# Allegro board SADA_controller.brd
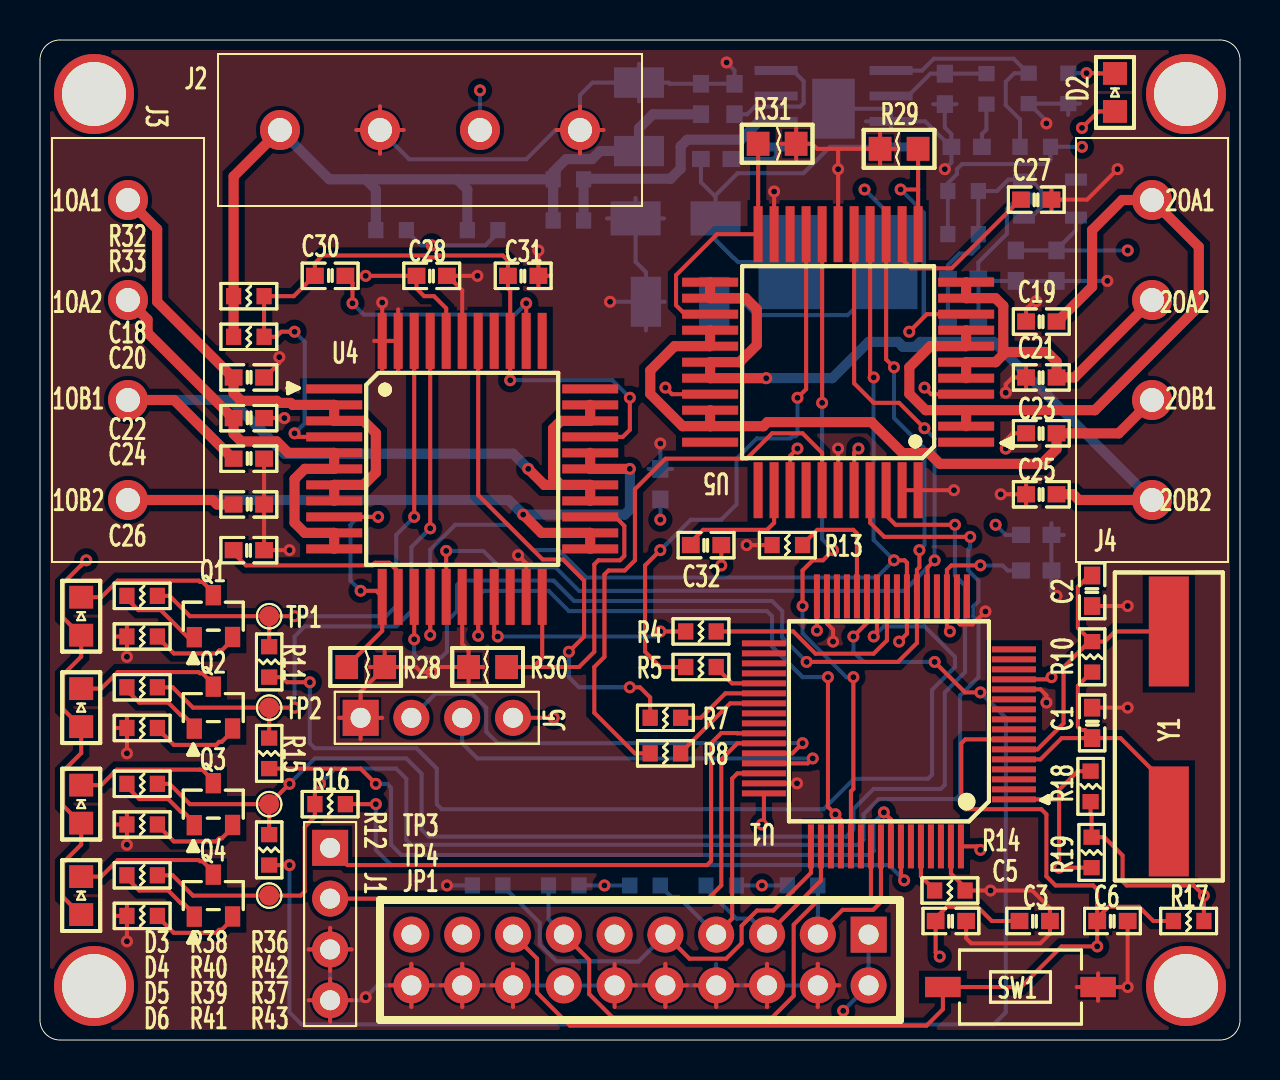
[diagram p0: board, top side]
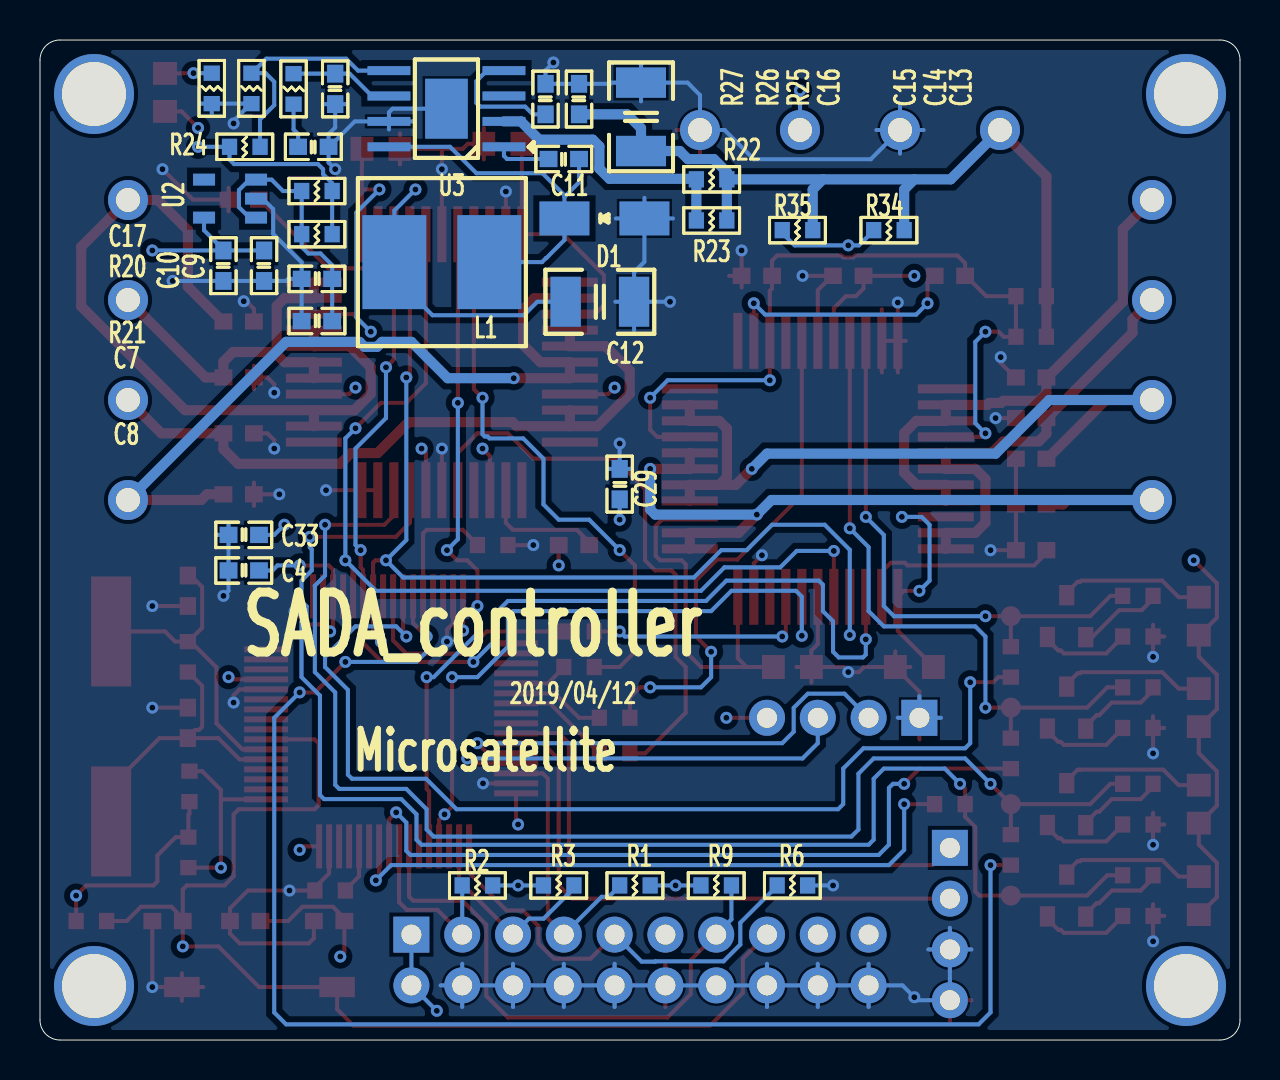
[diagram p1: board, bottom side, seen from below]

Outline 60 x 50 mm; copper layers: TOP, GND, POWER, BOTTOM. Coordinates in mm from the lower left corner of the outline.
Outline path: 0,49 arc(0.29,49.71) 1,50 59,50 arc(59.71,49.71) 60,49 60,1 arc(59.71,0.29) 59,0 1,0 arc(0.29,0.29) 0,1 0,49

## Placement (name value [footprint] x y rotation side)
C1  20pF  [SC0603]  52.61 15.86 90 top
C2  20pF  [SC0603]  52.61 22.46 270 top
C3  100nF  [SC0603]  49.74 5.95 0 top
C4  1uF  [SC0603]  49.81 23.48 0 bottom
C5  10uF  [SC0603]  45.54 5.95 0 top
C6  100nF  [SC0603]  53.62 5.95 0 top
C7  100nF  [SC0603]  46.15 38.06 0 bottom
C8  10uF  [SC0603]  46.15 35.95 0 bottom
C9  100nF  [SC0603]  48.8 38.72 270 bottom
C10  10uF  [SC0603]  50.83 38.72 270 bottom
C11  100nF  [SC0603]  33.81 44.05 180 bottom
C12  22uF  [SC1210]  32.01 36.91 180 bottom
C13  10uF/50V  [SC1210]  29.95 46.16 90 bottom
C14  100nF  [SC0603]  33.05 47.05 270 bottom
C15  8.2nF  [SC0603]  34.72 47.05 270 bottom
C16  25pF  [SC0603]  45.24 47.56 270 bottom
C17  1.2nf  [SC0603]  46.33 44.66 180 bottom
C18  100pF/100V  [SC0603]  10.44 33.13 180 top
C19  100pF/100V  [SC0603]  50.07 35.92 0 top
C20  100pF/100V  [SC0603]  10.44 31.1 180 top
C21  100pF/100V  [SC0603]  50.07 33.13 0 top
C22  100pF/100V  [SC0603]  10.44 29.06 180 top
C23  100pF/100V  [SC0603]  50.07 30.33 0 top
C24  100pF/100V  [SC0603]  10.44 26.78 180 top
C25  100pF/100V  [SC0603]  50.07 27.29 0 top
C26  470nF/16V  [SC0603]  10.44 24.49 0 top
C27  470nF/16V  [SC0603]  49.81 42.02 0 top
C28  100nF/50V  [SC0603]  19.59 38.21 0 top
C29  100nF/50V  [SC0603]  31.02 27.79 90 bottom
C30  220nF/16V  [SC0603]  14.51 38.21 180 top
C31  100nF/50V  [SC0603]  24.16 38.21 0 top
C32  220nF/16V  [SC0603]  33.3 24.75 0 top
C33  100nF/50V  [SC0603]  49.81 25.25 0 bottom
D1  B320A  [SMA]  31.78 41.08 0 bottom
D2  Green  [LED0805]  53.75 47.38 270 top
D3  Yellow  [LED0805]  2.06 21.19 270 top
D4  Yellow  [LED0805]  2.06 16.62 270 top
D5  Yellow  [LED0805]  2.06 11.79 270 top
D6  Yellow  [LED0805]  2.06 7.22 270 top
J1  CON_UART  [CON_IP]  14.51 5.8 0 top
J2  CON_PWR  [CON4]  19.5 45.5 270 top
J3  CON_DRV  [CON4]  4.4 34.5 0 top
J4  CON_DRV  [CON4]  55.6 34.5 0 top
J5  CON_IO  [CON_IP]  19.84 16.11 90 top
JP1  -  [JTAG]  30 4 180 top
L1  6.8uH  [SL]  39.91 38.89 0 bottom
Q1  9013  [SOT23_3]  8.66 21.19 0 top
Q2  9013  [SOT23_3]  8.66 16.62 0 top
Q3  9013  [SOT23_3]  8.66 11.79 0 top
Q4  9013  [SOT23_3]  8.66 7.22 0 top
R1  10K  [SR0603]  30.25 7.73 0 bottom
R2  10K  [SR0603]  38.13 7.73 0 bottom
R3  10K  [SR0603]  34.06 7.73 180 bottom
R4  0  [SR0603]  33.05 20.43 180 top
R5  0  [SR0603]  33.05 18.65 180 top
R6  10K  [SR0603]  22.38 7.73 0 bottom
R7  0  [SR0603]  31.27 16.11 180 top
R8  0  [SR0603]  31.27 14.33 180 top
R9  10K  [SR0603]  26.19 7.73 180 bottom
R10  1M  [SR0603]  52.61 19.16 90 top
R11  0  [SR0603]  11.46 18.9 270 top
R12  0  [SR0603]  11.46 9.51 270 top
R13  10K  [SR0603]  37.37 24.75 0 top
R14  10K  [SR0603]  45.49 7.47 0 top
R15  0  [SR0603]  11.46 14.33 270 top
R16  0  [SR0603]  14.51 11.79 0 top
R17  10K  [SR0603]  57.43 5.95 180 top
R18  2  [SR0603]  52.53 12.68 270 top
R19  2  [SR0603]  52.58 9.38 90 top
R20  510m  [SR0603]  46.15 42.45 180 bottom
R21  510m  [SR0603]  46.15 40.29 180 bottom
R22  510m  [SR0603]  26.42 43.03 180 bottom
R23  510m  [SR0603]  26.42 40.98 180 bottom
R24  27K  [SR0603]  49.76 44.66 180 bottom
R25  36K  [SR0603]  47.32 47.56 270 bottom
R26  5.1K  [SR0603]  49.43 47.58 270 bottom
R27  560  [SR0603]  51.41 47.58 270 bottom
R28  0R15  [SR0805]  16.28 18.65 180 top
R29  0R15  [SR0805]  42.95 44.56 0 top
R30  0R15  [SR0805]  22.38 18.65 0 top
R31  0R15  [SR0805]  36.86 44.81 180 top
R32  510m  [SR0603]  10.44 37.19 0 top
R33  510m  [SR0603]  10.44 35.16 0 top
R34  510m  [SR0603]  17.55 40.49 0 bottom
R35  510m  [SR0603]  22.13 40.49 0 bottom
R36  1K  [SR0603]  5.11 12.81 180 top
R37  1K  [SR0603]  5.11 8.24 180 top
R38  1K  [SR0603]  5.11 22.21 180 top
R39  1K  [SR0603]  5.11 17.63 180 top
R40  200  [SR0603]  5.11 20.17 0 top
R41  200  [SR0603]  5.11 15.6 0 top
R42  200  [SR0603]  5.11 10.78 0 top
R43  200  [SR0603]  5.11 6.2 0 top
REF DES  -  [unnamed]  2.7 47.3 0 top
REF DES#2  -  [unnamed]  57.3 47.3 0 top
REF DES#3  -  [unnamed]  2.7 2.7 0 top
REF DES#4  -  [unnamed]  57.3 2.7 0 top
SW1  RST  [SW]  49.02 2.65 0 top
TP1  -  [TP]  11.46 21.19 0 top
TP2  -  [TP]  11.46 16.62 0 top
TP3  -  [TP]  11.46 11.79 0 top
TP4  -  [TP]  11.46 7.22 0 top
U1  STM32F103RBT6  [LQFP64]  42.45 15.93 180 top
U2  TPS73633DBV  [SOT23_5]  50.5 42.07 0 bottom
U3  TPS54332  [SOIC-PAD]  39.68 46.56 90 bottom
U4  TMC260  [PQFP44]  21.11 28.56 0 top
U5  TMC260  [PQFP44]  39.91 33.89 180 top
Y1  8M  [CRYSTAL]  56.44 15.68 270 top

## Library data of the parts
C1-C33 = CAP NP
D1 = DIODE SCHOTTKY
D2-D6 = LED
J1-J5 = CON4
JP1 = JTAG_1
L1 = INDUCTOR
Q1-Q4 = 2N1069
R1-R43 = R
SW1 = SW_PB_SPST
TP1-TP4 = TP
U1 = STM32F103RBT6_1
U2 = TPS73633DBV_0
U3 = TPS54332
U4 U5 = TMC260_2
Y1 = CRYSTAL

## Footprints (pads in the part's own frame, mm; a bottom-side part is the same pattern mirrored in y, then rotated)
CON4
  round 2 hole 1.2: 1(0,7.5) 2(0,2.5) 3(0,-2.5) 4(0,-7.5)
CON_IP
  rect 1.8x1.8 hole 1: 1(0,3.81)
  round 1.8 hole 1: 2(0,1.27) 3(0,-1.27) 4(0,-3.81)
CRYSTAL
  rect 5.5x2 smd: 1(-4.75,0) 2(4.75,0)
JTAG
  rect 1.8x1.8 hole 1: 1(-11.43,-1.27)
  round 1.8 hole 1: 2(-11.43,1.27) 3(-8.89,-1.27) 4(-8.89,1.27) 5(-6.35,-1.27) 6(-6.35,1.27) 7(-3.81,-1.27) 8(-3.81,1.27) 9(-1.27,-1.27) 10(-1.27,1.27) 11(1.27,-1.27) 12(1.27,1.27) 13(3.81,-1.27) 14(3.81,1.27) 15(6.35,-1.27) 16(6.35,1.27) 17(8.89,-1.27) 18(8.89,1.27) 19(11.43,-1.27) 20(11.43,1.27)
LED0805
  rect 1.14x1.2 smd: 1(-0.95,0) 2(0.95,0)
LQFP64
  rect 2.2x0.3 smd: 1(-6.25,3.9) 2(-6.25,3.4) 3(-6.25,2.9) 4(-6.25,2.4) 5(-6.25,1.9) 6(-6.25,1.4) 7(-6.25,0.9) 8(-6.25,0.4) 9(-6.25,-0.1) 10(-6.25,-0.6) 11(-6.25,-1.1) 12(-6.25,-1.6) 13(-6.25,-2.1) 14(-6.25,-2.6) 15(-6.25,-3.1) 16(-6.25,-3.6) 33(6.25,-3.9) 34(6.25,-3.4) 35(6.25,-2.9) 36(6.25,-2.4) 37(6.25,-1.9) 38(6.25,-1.4) 39(6.25,-0.9) 40(6.25,-0.4) 41(6.25,0.1) 42(6.25,0.6) 43(6.25,1.1) 44(6.25,1.6) 45(6.25,2.1) 46(6.25,2.6) 47(6.25,3.1) 48(6.25,3.6)
  rect 0.3x2.2 smd: 17(-3.9,-6.25) 18(-3.4,-6.25) 19(-2.9,-6.25) 20(-2.4,-6.25) 21(-1.9,-6.25) 22(-1.4,-6.25) 23(-0.9,-6.25) 24(-0.4,-6.25) 25(0.1,-6.25) 26(0.6,-6.25) 27(1.1,-6.25) 28(1.6,-6.25) 29(2.1,-6.25) 30(2.6,-6.25) 31(3.1,-6.25) 32(3.6,-6.25) 49(3.9,6.25) 50(3.4,6.25) 51(2.9,6.25) 52(2.4,6.25) 53(1.9,6.25) 54(1.4,6.25) 55(0.9,6.25) 56(0.4,6.25) 57(-0.1,6.25) 58(-0.6,6.25) 59(-1.1,6.25) 60(-1.6,6.25) 61(-2.1,6.25) 62(-2.6,6.25) 63(-3.1,6.25) 64(-3.6,6.25)
PQFP44
  rect 2.8x0.45 smd: 1(-6.4,4) 2(-6.4,3.2) 3(-6.4,2.4) 4(-6.4,1.6) 5(-6.4,0.8) 6(-6.4,0) 7(-6.4,-0.8) 8(-6.4,-1.6) 9(-6.4,-2.4) 10(-6.4,-3.2) 11(-6.4,-4) 23(6.4,-4) 24(6.4,-3.2) 25(6.4,-2.4) 26(6.4,-1.6) 27(6.4,-0.8) 28(6.4,0) 29(6.4,0.8) 30(6.4,1.6) 31(6.4,2.4) 32(6.4,3.2) 33(6.4,4)
  rect 0.45x2.8 smd: 12(-4,-6.4) 13(-3.2,-6.4) 14(-2.4,-6.4) 15(-1.6,-6.4) 16(-0.8,-6.4) 17(0,-6.4) 18(0.8,-6.4) 19(1.6,-6.4) 20(2.4,-6.4) 21(3.2,-6.4) 22(4,-6.4) 34(4,6.4) 35(3.2,6.4) 36(2.4,6.4) 37(1.6,6.4) 38(0.8,6.4) 39(0,6.4) 40(-0.8,6.4) 41(-1.6,6.4) 42(-2.4,6.4) 43(-3.2,6.4) 44(-4,6.4)
SC0603
  rect 0.889x0.813 smd: 1(-0.762,0) 2(0.762,0)
SC1210
  rect 1.52x2.5 smd: 1(-1.71,0) 2(1.71,0)
SL
  rect 3.2x4.7 smd: 1(-2.375,0) 2(2.375,0)
SMA
  rect 2.5x1.7 smd: 1(-2,0) 2(2,0)
SOIC-PAD
  rect 0.45x2.15 smd: 1(-1.905,-2.875) 2(-0.635,-2.875) 3(0.635,-2.875) 4(1.905,-2.875) 5(1.905,2.875) 6(0.635,2.875) 7(-0.635,2.875) 8(-1.905,2.875)
  rect 3x2.13 smd: 9(0,0)
SOT23_3
  rect 0.762x1.016 smd: 1(-0.95,-1.05) 2(0,1.05) 3(0.965,-1.041)
SOT23_5
  rect 1.1x0.6 smd: 1(-1.3,0.95) 2(-1.3,0) 3(-1.3,-0.95) 4(1.3,-0.95) 5(1.3,0.95)
SR0603
  rect 0.762x0.813 smd: 1(-0.762,0) 2(0.762,0)
SR0805
  rect 1.14x1.2 smd: 1(-0.95,0) 2(0.95,0)
SW
  rect 1.778x1.016 smd: 1(-3.88,0) 2(3.88,0)
TP
  round 1 smd: 1(0,0)
unnamed
  round 4 hole 3.2: 1(0,0)

## Nets
GND: C1.2 C2.2 C3.2 C4.2 C5.2 C6.2 C7.2 C8.2 C9.2 C10.2 C12.2 C13.2 C14.1 C15.1 C16.2 C17.2 C18.1 C19.1 C20.1 C21.1 C22.1 C23.1 C24.1 C25.1 C26.2 C27.2 C28.2 C29.2 C31.2 C33.2 D1.1(ANODE) J1.3 J1.4 J2.1 J2.3 J5.1 JP1.4(GND) JP1.6(GND1) JP1.8(GND2) JP1.10(GND3) JP1.12(GND4) JP1.14(GND5) JP1.16(GND6) JP1.18(GND7) JP1.20(GND8) R6.1 R13.1 R14.2 R26.2 R27.2 R28.1 R29.1 R30.1 R31.1 R40.1 R41.1 R42.1 R43.1 SW1.2 U1.12(VSSA) U1.18(VSS4) U1.31(VSS1) U1.47(VSS2) U1.63(VSS3) U2.2(GND) U3.7(GND) U3.9(PAD) U4.17(GND) U4.21(CLK) U4.39(GND1) U4.43(TST_MODE) U4.44(GND2) U5.17(GND) U5.21(CLK) U5.39(GND1) U5.43(TST_MODE) U5.44(GND2)
VCC3V3: C9.1 C10.1 C28.1 C29.1 D3.2(ANODE) D4.2(ANODE) D5.2(ANODE) D6.2(ANODE) J5.4 JP1.1(VDD) JP1.2(VDD1) R1.1 R2.1 R3.1 R9.1 R17.1 R18.2 R19.2 U2.5(OUT) U4.40(VCC_IO) U5.40(VCC_IO)
VCC5V: C12.1 D2.2(ANODE) J2.2 L1.2 R20.2 R21.2 R24.1
1OA1: C18.2 J3.1 U4.2(OA1_1) U4.3(OA1_2) U4.7(OA1_3) U4.8(OA1_4)
1OA2: C20.2 J3.2 U4.5(OA2_1) U4.6(OA2_2) U4.10(OA2_3) U4.11(OA2_4)
1OB1: C22.2 J3.3 U4.26(OB1_1) U4.27(OB1_2) U4.31(OB1_3) U4.32(OB1_4)
1OB2: C24.2 J3.4 U4.23(OB2_1) U4.24(OB2_2) U4.28(OB2_3) U4.29(OB2_4)
2OA1: C19.2 J4.1 U5.2(OA1_1) U5.3(OA1_2) U5.7(OA1_3) U5.8(OA1_4)
2OA2: C21.2 J4.2 U5.5(OA2_1) U5.6(OA2_2) U5.10(OA2_3) U5.11(OA2_4)
2OB1: C23.2 J4.3 U5.26(OB1_1) U5.27(OB1_2) U5.31(OB1_3) U5.32(OB1_4)
2OB2: C25.2 J4.4 U5.23(OB2_1) U5.24(OB2_2) U5.28(OB2_3) U5.29(OB2_4)
D1: R15.1 R39.1 TP2.1(TP) U4.41(DIR)
D2: R16.1 R37.1 TP4.1(TP) U5.41(DIR)
EN1: R4.2 U4.19(ENN)
EN2: R5.2 U5.19(ENN)
IO1: J5.2 U1.44(PA11/USART1_CTS/CANRX/USBDM/TIM)
IO2: J5.3 U1.45(PA12/USART1_RTS/CANTX/USBDP/TIM)
JNTRST: JP1.3(TRST) R2.2 U1.56(PB4/JNTRST)
JTCK: JP1.9(TCK/SWCLK) R6.2 U1.49(PA14/JTCK/SWCLK)
JTDI: JP1.5(TDI) R3.2 U1.50(PA15/JTDI)
JTDO: JP1.13(TDO/SWO) R9.2 U1.55(PB3/JTDO)
JTMS: JP1.7(TMS/SWDIO) R1.2 U1.46(PA13/JTMS/SWDIO)
RST: C6.1 JP1.15(NSRST) R17.2 SW1.1 U1.7(NRST)
S1: R11.1 R38.1 TP1.1(TP) U4.42(STEP)
S2: R12.1 R36.1 TP3.1(TP) U5.42(STEP)
SG_TST1: R7.2 U4.38(SG_TST)
SG_TST2: R8.2 U5.38(SG_TST)
SPI1_CS1: U1.52(PC11) U4.18(CSN)
SPI1_CS2: U1.53(PC12) U5.18(CSN)
SPI1_MISO: U1.22(PA6/SPI1_MISO/ADC12_IN6/TIM3_CH) U4.14(SDO) U5.14(SDO)
SPI1_MOSI: U1.23(PA7/SPI1_MOSI/ADC12_IN7/TIM3_CH) U4.15(SDI) U5.15(SDI)
SPI1_SCK: U1.21(PA5/SPI1_SCK/ADC12_IN5) U4.16(SCK) U5.16(SCK)
UART_RX: J1.2 U1.43(PA10/USART1_RX/TIM1_CH3)
UART_TX: J1.1 U1.42(PA9/USART1_TX/TIM1_CH2)
VM: C13.1 C14.2 J2.4 R22.2 R23.2 R32.1 R33.1 R34.1 R35.1
N05483: C3.1 C4.1 C5.1 R18.1 R19.1 U1.1(VBAT) U1.13(VDDA) U1.19(VDD4) U1.32(VDD1) U1.48(VDD2) U1.64(VDD3)
N21992: C26.1 U4.13(5VOUT)
N22004: C30.2 C31.1 R32.2 R33.2 U4.4(VSA) U4.30(VSB) U4.36(VS)
N22032: R28.2 U4.9(BRA) U4.12(SRA)
N22036: R30.2 U4.22(SRB) U4.25(BRB)
N22220: C30.1 U4.35(VHS)
N35028: C32.2 C33.1 R34.2 R35.2 U5.4(VSA) U5.30(VSB) U5.36(VS)
N35250: C27.1 U5.13(5VOUT)
N35390: R29.2 U5.9(BRA) U5.12(SRA)
N35394: R31.2 U5.22(SRB) U5.25(BRB)
N35558: C32.1 U5.35(VHS)
N40313: C1.1 R10.1 U1.5(PD0/OSC_IN) Y1.2
N40433: C2.1 R10.2 U1.6(PD1/OSC_OUT) Y1.1
N53650: R13.2 U1.28(PB2/BOOT1)
N54391: R14.1 U1.60(BOOT0)
N107724: Q1.1(B) R38.2
N107754: Q1.3(E) R40.2
N108391: D3.1(CATHODE) Q1.2(C)
N108637: Q2.1(B) R39.2
N108657: Q2.3(E) R41.2
N108719: D4.1(CATHODE) Q2.2(C)
N109031: Q3.1(B) R36.2
N109051: Q3.3(E) R42.2
N109113: D5.1(CATHODE) Q3.2(C)
N109117: Q4.1(B) R37.2
N109155: Q4.3(E) R43.2
N109209: D6.1(CATHODE) Q4.2(C)
N115260: C11.2 D1.2(CATHODE) L1.1 U3.8(PH)
N115348: R24.2 R26.1 U3.5(VSENSE)
N115408: C16.1 R25.1 U3.6(COMP)
N115520: D2.1(CATHODE) R27.1
N115576: R22.1 R23.1 U3.2(VIN)
N115630: C11.1 U3.1(BOOT)
N115702: C15.2 U3.4(SS)
N116307: C7.1 C8.1 R20.1 R21.1 U2.1(IN) U2.3(EN)
N124957: R4.1 U1.25(PC5/ADC12_IN15)
N124977: R5.1 U1.37(PC6)
N124981: R7.1 U1.38(PC7)
N124985: R8.1 U1.39(PC8)
N1153681: C17.1 R25.2
N9821225: R11.2 U1.26(PB0/ADC12_IN8/TIM3_CH3)
N9821252: R12.2 U1.27(PB1/ADC12_IN9/TIM3_CH4)
N9821256: R15.2 U1.57(PB5/I2C1_SMBAI)
N9821257: R16.2 U1.58(PB6/I2C1_SCL/TIM4_CH1)

Pads without a net: JP1 11 17 19; REF DES 1; REF DES#2 1; REF DES#3 1; REF DES#4 1; U1 2 3 4 8 9 10 11 14 15 16 17 20 24 29 30 33 34 35 36 40 41 51 54 59 61 62; U2 4; U3 3; U4 1 20 33 34 37; U5 1 20 33 34 37

## Via types
v1: diameter 0.6, hole 0.3, TOP to BOTTOM, 127 vias

## Routing (per net, layer and track width the routed paths; a pad name or vN(x,y) marks a point on that pad's centre or on a via; arc(x,y) is an arc through that point)
GND: length 360.3
  TOP w0.203: C20.1 v1(12.22,31.1) ; JP1.10 32.35,2.73 ; JP1.10 31.27,3.81 ; JP1.10 31.27,1.65 ; JP1.10 30.19,2.73 ; 28.73,1.65 JP1.12 ; JP1.12 29.81,2.73 ; JP1.12 28.73,3.81 ; R29.1 42.75,44.56 ; R29.1 42,45.34 ; R29.1 39.91,44.56 ; R29.1 42,43.78 ; v1(23.9,24.24) 24.31,23.83 U4.21 ; R13.1 v1(35.33,24.75) ; C6.2 v1(54.38,2.65) SW1.2 ; C1.2 v1(54.38,16.62) ; v1(45.7,27.49) U5.44 U5.43 ; J1.4 14.51,3.07 ; J1.4 14.51,0.91 ; J1.4 15.58,1.99 ; J1.4 13.43,1.99 ; R31.1 37.81,45.59 ; R31.1 37.81,44.03 ; R31.1 38.61,44.81 38.86,44.56 39.91,44.56 ; R31.1 37.06,44.81 ; 3.79,20.17 R40.1 ; R40.1 4.35,20.76 ; R40.1 v1(4.35,19.16) ; C23.1 48.63,30.33 48.29,29.99 v1(48.29,29.57) ; 21.11,1.65 JP1.18 ; JP1.18 20.03,2.73 ; JP1.18 22.19,2.73 ; JP1.18 21.11,3.81 ; SW1.2 51.84,2.65 ; SW1.2 52.9,3.33 ; SW1.2 52.9,1.96 ; 18.57,1.65 JP1.20 ; JP1.20 17.49,2.73 ; JP1.20 18.57,3.81 ; JP1.20 19.65,2.73 ; C21.1 48.63,33.13 48.29,32.79 v1(48.29,32.37) ; C21.1 49.3,32.54 ; C21.1 49.3,33.71 ; R42.1 v1(4.35,9.76) ; R42.1 4.35,11.36 ; R42.1 3.79,10.78 ; JP1.16 23.65,3.81 ; JP1.16 23.65,1.65 ; JP1.16 22.57,2.73 ; R41.1 4.35,16.19 ; R41.1 v1(4.35,14.33) ; R41.1 3.79,15.6 ; R30.1 19.84,18.65 v1(19.59,18.4) 19.06,18.4 18.8,18.65 R28.1 ; R30.1 22.18,18.65 ; R30.1 21.43,19.48 21.11,19.8 U4.17 ; R30.1 21.43,17.87 ; v1(50.32,16.87) 50.32,17.24 50.02,17.53 U1.12 ; 32.73,2.73 JP1.8 ; JP1.8 34.89,2.73 ; JP1.8 33.81,1.65 ; C25.1 v1(48.03,27.29) ; C25.1 49.3,26.7 ; C25.1 49.3,27.87 ; 50.57,41.43 C27.2 ; C27.2 52.35,42.02 v1(53.88,43.54) ; C27.2 50.57,42.6 ; U1.31 39.35,20.83 39.65,20.52 v1(39.65,19.92) ; R43.1 4.35,6.79 ; R43.1 v1(4.35,4.93) ; R43.1 3.79,6.2 ; 16.49,18.65 R28.1 ; R28.1 17.23,18.62 16.03,17.42 J5.1 ; R28.1 17.23,19.43 ; C18.1 11.24,33.13 11.97,33.85 v1(11.97,34.14) ; J1.3 15.58,4.53 ; J1.3 14.51,3.45 ; J1.3 13.43,4.53 ; J1.3 14.51,5.61 ; 24.92,37.62 C31.2 ; C31.2 v1(24.92,39.48) ; C31.2 25.54,38.21 ; v1(12.47,24.49) C26.2 C24.1 C22.1 ; v1(47.27,21.43) 46.62,20.78 46,20.78 45.85,20.93 U1.18 ; 35.27,2.73 JP1.6 ; JP1.6 36.35,1.65 ; JP1.6 36.35,3.81 ; U5.39 v1(39.91,29.57) ; U4.43 17.91,36.53 ; U4.43 U4.44 ; U4.43 17.91,33.38 ; J2.1 28.18,45.5 ; J2.1 27,46.68 ; J2.1 27,44.32 ; J2.1 25.82,45.5 ; 39.91,44.56 v1(39.91,43.54) U5.17 ; U1.63 45.55,8.33 46.26,7.62 R14.2 v1(47.53,7.47) 49.61,7.47 50.5,6.59 C3.2 50.5,5.32 50.02,4.83 46.56,4.83 46.31,5.09 C5.2 ; U4.44 16.71,34.96 ; U4.44 17.11,33.38 ; U4.44 v1(17.11,36.87) ; C28.2 20.39,38.21 ; 20.39,38.21 21.11,37.48 U4.39 ; 20.39,38.21 v1(21.87,38.21) ; JP1.4 39.97,2.73 ; JP1.4 38.89,3.81 ; JP1.4 38.89,1.65 ; J2.3 18.18,45.5 ; J2.3 15.82,45.5 ; J2.3 17,46.68 ; J2.3 17,44.32 ; C2.2 v1(54.38,21.7) ; 14.95,16.11 J5.1 ; J5.1 17.11,16.11 ; J5.1 16.03,15.03 ; C19.1 49.3,36.56 49.69,36.94 v1(49.81,36.94) ; U5.21 v1(36.71,42.42) ; U1.47 v1(37.85,12.83)
  GND w0.203: JP1.12 28.73,3.81 ; JP1.12 27.65,2.73 ; JP1.12 29.81,2.73 ; JP1.12 28.73,1.65 ; J1.4 14.51,3.07 ; J1.4 13.43,1.99 ; J1.4 14.51,0.91 ; J1.4 15.58,1.99 ; 38.89,1.65 JP1.4 ; JP1.4 38.89,3.81 ; JP1.4 37.81,2.73 ; JP1.4 39.97,2.73 ; 14.95,16.11 J5.1 ; J5.1 16.03,17.19 ; J5.1 16.03,15.03 ; J5.1 17.11,16.11 ; 14.51,3.45 J1.3 ; J1.3 15.58,4.53 ; J1.3 13.43,4.53 ; J1.3 14.51,5.61 ; 31.27,1.65 JP1.10 ; JP1.10 30.19,2.73 ; JP1.10 31.27,3.81 ; JP1.10 32.35,2.73 ; 35.27,2.73 JP1.6 ; JP1.6 36.35,3.81 ; JP1.6 37.43,2.73 ; JP1.6 36.35,1.65 ; JP1.18 22.19,2.73 ; JP1.18 20.03,2.73 ; JP1.18 21.11,3.81 ; JP1.18 21.11,1.65 ; JP1.14 26.19,3.81 ; JP1.14 26.19,1.65 ; JP1.14 27.27,2.73 ; JP1.14 25.11,2.73 ; J2.3 18.18,45.5 ; J2.3 17,44.32 ; J2.3 17,46.68 ; J2.3 15.82,45.5 ; JP1.8 34.89,2.73 ; JP1.8 32.73,2.73 ; JP1.8 33.81,1.65 ; JP1.8 33.81,3.81 ; 17.49,2.73 JP1.20 ; JP1.20 18.57,1.65 ; JP1.20 19.65,2.73 ; JP1.20 18.57,3.81 ; 25.82,45.5 J2.1 ; J2.1 27,44.32 ; J2.1 28.18,45.5 ; J2.1 27,46.68 ; JP1.16 24.73,2.73 ; JP1.16 23.65,1.65 ; JP1.16 23.65,3.81 ; JP1.16 22.57,2.73
  GND w0.508: 23.4,40.49 23.4,40.74 23.17,40.98 22.91,40.98
  BOTTOM w0.203: JP1.4 38.89,3.81 ; JP1.4 39.97,2.73 ; JP1.4 38.89,1.65 ; JP1.4 JP1.6 ; J1.3 15.58,4.53 ; J1.3 13.43,4.53 ; J1.3 14.51,5.61 ; J1.3 J1.4 16.13,1.99 v1(16.28,2.14) 16.87,2.73 JP1.20 ; JP1.20 18.57,1.65 ; JP1.20 18.57,3.81 ; JP1.20 JP1.18 ; D1.1 31.21,41.08 ; D1.1 28.35,41.08 ; D1.1 29.78,38.91 30.3,38.39 C12.2 ; D1.1 29.78,42.11 ; JP1.8 33.81,3.81 ; JP1.8 JP1.6 ; JP1.8 JP1.10 ; JP1.8 33.81,1.65 ; R27.2 49.46,46.82 ; R27.2 52,46.82 ; R27.2 51.41,46.26 ; 49.46,46.82 50.32,45.95 v1(50.32,45.83) ; 49.46,46.82 R26.2 ; JP1.6 36.35,1.65 ; JP1.6 36.35,3.81 ; U3.9 42.37,46.56 42.55,46.38 U3.7 ; 29.95,46.93 C13.2 ; C13.2 27.62,47.87 27,47.25 J2.1 25.77,45.5 24.31,44.04 18.46,44.04 J2.3 ; C13.2 31.43,47.87 31.49,47.81 C14.1 C15.1 34.72,48.48 v1(34.33,48.88) ; C13.2 29.95,48.81 ; JP1.16 JP1.14 JP1.12 JP1.10 ; JP1.16 JP1.18 ; JP1.16 23.65,3.81 ; JP1.16 23.65,1.65 ; J5.1 17.11,16.11 ; J5.1 14.95,16.11 ; J5.1 16.03,17.19 ; v1(45.24,43.54) 45.57,43.87 C17.2 ; R6.1 v1(20.35,7.73) ; JP1.10 31.27,3.81 ; JP1.10 31.27,1.65 ; JP1.18 21.11,1.65 ; JP1.18 21.11,3.81 ; U3.7 44.26,45.93 45.53,44.66 C17.2 ; U3.7 41.3,45.93 ; U3.7 42.55,45.53 ; C16.2 45.24,45.62 45.57,45.29 C17.2 ; C16.2 45.82,46.79 ; C16.2 44.66,46.79 ; 15.82,45.5 J2.3 ; J2.3 17,44.32 ; J2.3 18.18,45.5 ; J2.3 17,46.68 ; v1(50.83,22.21) 50.57,22.46 C4.2 C33.2 ; C8.2 C7.2 ; C7.2 46.92,38.88 48.34,40.31 48.34,41.55 48.87,42.07 U2.2 ; C7.2 47.59,38.06 47.69,37.95 C9.2 C10.2 v1(53.37,37.95) ; 30.43,28.56 C29.2 ; C29.2 31.6,28.56 ; C29.2 v1(31.02,29.83) ; C33.2 51.2,25.25 ; C33.2 50.57,25.84 ; C12.2 31.23,36.91 ; C12.2 30.3,35.48 ; C12.2 v1(28.5,36.91)
VCC3V3: length 67
  TOP w0.203: v1(40.92,29.57) 40.91,29.57 40.71,29.37 U5.40 ; v1(16.28,38.21) C28.1 18.82,37.57 19.2,37.19 19.7,37.19 20.31,36.58 U4.40 ; J5.4 v1(25.68,16.11) ; 52.53,11.92 52.53,11.31 52.58,11.26 R19.2 53.22,10.14 54.13,9.23 54.13,7.93 54.33,7.73 57.69,7.73 v1(58.19,7.22) R17.1 ; D6.2 2.03,6.27 1.16,7.14 1.16,8.87 2.06,9.77 D5.2 2.03,10.84 1.16,11.72 1.16,13.44 2.06,14.34 D4.2 2.03,15.67 1.16,16.54 1.16,18.26 2.06,19.17 D3.2 2.03,20.24 1.16,21.11 1.16,22.84 2.05,23.73 2.06,23.73 v1(2.31,23.98)
  POWER w0.203: 40.35,2.73 JP1.2 41.43,1.65 ; J5.4 23.65,17.19 ; J5.4 22.57,16.11 ; J5.4 23.65,15.03 ; J5.4 24.73,16.11
  BOTTOM w0.203: R2.1 v1(36.1,7.73) R3.1 ; R1.1 v1(28.22,7.73) R9.1 ; JP1.1 JP1.2 v1(40.16,1.46) ; C29.1 v1(31.02,26.02) ; C10.1 v1(54.38,39.48) ; C10.1 C9.1 ; C10.1 50.83,39.52 51.8,40.49 U2.5
VCC5V: length 31.3
  TOP w0.203: D2.2 52.92,46.43 v1(52.1,45.61)
  POWER w0.203: 22,46.68 J2.2 23.18,45.5
  BOTTOM w0.203: C12.1 35.13,36.91 35.8,36.24 40.38,36.24 42.28,38.14 L1.2 42.28,41.47 v1(41.23,42.53) ; v1(52.1,44.66) R24.1 50.52,44.02 50.29,43.8 46.1,43.8 45.84,43.54 45.84,43.29 45.39,42.84 R20.2 R21.2 ; J2.2 v1(22,47.48)
1OA1: length 25.4
  TOP w0.508: U4.8 U4.7 16.18,27.76 16.79,28.37 16.79,30.35 16.18,30.96 U4.3 U4.2 12.63,31.76 12.53,31.85 11.94,31.85 11.84,31.96 10.06,31.96 9.68,32.34 C18.2 9.64,33.13 5.86,36.91 5.86,40.54 J3.1
1OA2: length 22.5
  TOP w0.508: U4.11 U4.10 13.24,25.36 12.73,25.87 12.73,28.05 13.24,28.56 U4.6 U4.5 12.41,29.36 11.84,29.93 10.06,29.93 9.68,30.31 C20.2 9.64,31.1 5.38,35.36 5.38,36.02 J3.2
1OB1: length 38
  TOP w0.508: J3.3 6.71,32 9.64,29.06 C22.2 ; 26.04,27.76 25.21,27.76 v1(24.41,28.56) ; 26.04,27.76 U4.27 U4.26 ; 26.04,27.76 25.65,28.14 25.65,30.57 26.04,30.96 U4.31 U4.32
  BOTTOM w0.508: v1(24.41,28.56) 23.65,29.32 12.22,29.32 9.54,32 J3.3
1OB2: length 40.2
  TOP w0.508: U4.23 U4.24 25.07,25.36 v1(24.16,26.27) ; C24.2 8.85,26.78 8.63,27 J3.4 ; U4.29 U4.28 v1(29.49,28.56)
  BOTTOM w0.508: J3.4 23.43,27 v1(24.16,26.27) 29.24,26.27 29.49,26.52 v1(29.49,28.56)
2OA1: length 38.4
  TOP w0.508: U5.3 52.75,31.49 57.94,36.68 57.94,39.66 J4.1 54.11,42 52.61,40.49 52.61,37.66 50.87,35.92 C19.2 ; U5.3 U5.2 ; U5.3 44.28,31.49 43.47,32.31 43.47,33.64 44.52,34.69 U5.7 U5.8
2OA2: length 18.1
  TOP w0.508: J4.2 51.73,33.13 C21.2 50.83,33.92 50.35,34.4 48.16,34.4 ; 48.16,34.4 48.16,36.7 47.78,37.09 U5.10 U5.11 ; 48.16,34.4 48.16,34.28 47.78,33.89 U5.6 U5.5
2OB1: length 34.8
  TOP w0.508: U5.32 36.17,30.69 36.37,30.89 41.58,30.89 43.12,29.35 44.45,29.35 44.99,28.81 50.09,28.81 50.83,29.55 C23.2 53.93,30.33 J4.3 ; U5.32 32.13,30.69 30.51,32.31 30.51,33.48 31.73,34.69 U5.27 U5.26 ; U5.32 U5.31
2OB2: length 39.9
  TOP w0.508: C25.2 51.65,27.29 51.94,27 J4.4 ; v1(36.31,33.09) U5.29 U5.28 34.98,33.89 35.84,34.75 35.84,36.53 35.29,37.09 U5.24 U5.23
  BOTTOM w0.508: v1(36.31,33.09) 39.61,33.09 41.43,34.91 42.9,34.91 43.15,34.66 43.78,34.66 44.02,34.91 47.69,34.91 J4.4
D1: length 32.6
  TOP w0.203: R39.1 6.63,17.63 7.65,16.62 TP2.1 ; TP2.1 v1(12.73,16.62) ; TP2.1 R15.1 ; U4.41 v1(19.51,25.58)
  BOTTOM w0.203: v1(19.51,25.58) 18.57,24.64 18.57,21.44 17.81,20.68 13.24,20.68 12.73,20.17 v1(12.73,16.62)
D2: length 71.7
  TOP w0.203: U5.41 41.51,25.86 42.21,25.16 v1(46.51,25.16) ; R37.1 6.63,8.24 7.65,7.22 TP4.1 13.03,7.22 13.24,7.42 13.24,10.65 13.74,11.16 R16.1 13.74,12.55 v1(14,12.81)
  BOTTOM w0.203: v1(14,12.81) 14.76,13.57 17.81,13.57 18.32,13.06 18.32,10.01 18.57,9.76 40.92,9.76 41.18,10.01 41.18,11.28 41.94,12.05 45.8,12.05 46,12.25 46,17.22 46.92,18.14 46.92,20.92 46.67,21.18 46.67,21.68 46.92,21.94 46.92,22.97 46.41,23.48 46.41,24.53 46.51,24.63 v1(46.51,25.16)
EN1: length 11.6
  TOP w0.203: v1(22.89,20.17) 22.71,20.35 U4.19 ; v1(31.02,20.43) R4.2
  BOTTOM w0.203: v1(31.02,20.43) 30.76,20.17 v1(22.89,20.17)
EN2: length 28.5
  TOP w0.203: v1(37.87,32.11) 38.31,32.54 U5.19 ; R5.2 31.02,18.65 30.25,19.41 30.25,23.73 v1(31.02,24.49)
  BOTTOM w0.203: v1(31.02,24.49) 32.54,26.02 34.06,26.02 34.83,26.78 34.83,29.06 35.84,30.08 37.53,30.08 37.62,30.18 37.77,30.18 37.87,30.28 v1(37.87,32.11)
IO1: length 23.9
  TOP w0.203: U1.44 37.62,14.33 v1(38.13,14.84)
  BOTTOM w0.203: J5.2 19.77,17.31 21.61,17.31 22.31,16.61 22.31,15.41 22.89,14.84 v1(38.13,14.84)
IO2: length 21.7
  TOP w0.203: U1.45 38.39,13.83 v1(38.64,14.08)
  BOTTOM w0.203: v1(38.64,14.08) 21.87,14.08 21.11,14.84 J5.3
JNTRST: length 9.1
  TOP w0.203: JP1.3 40.13,6.51 41.66,6.51 42.05,6.9 U1.56
  BOTTOM w0.203: R2.2 JP1.3
JTCK: length 22.3
  TOP w0.203: JP1.9 32.47,4.07 34.31,4.07 35.08,4.84 35.08,5.7 35.85,6.47 36.67,6.47 38.55,8.35 U1.49
  BOTTOM w0.203: R6.2 23.14,7.7 24.99,5.86 24.99,4.77 25.82,3.93 29.23,3.93 29.25,3.92 29.92,3.92 JP1.9
JTDI: length 9.7
  TOP w0.203: U1.50 39.05,7.97 JP1.5
  BOTTOM w0.203: R3.2 33.3,7.58 34.82,6.07 35.55,6.07 JP1.5
JTDO: length 27.9
  TOP w0.203: JP1.13 27.46,4 27.46,2.3 28.63,1.12 36.6,1.12 37.69,2.21 37.69,5.77 38.88,6.97 41.34,6.97 41.55,7.17 U1.55
  BOTTOM w0.203: JP1.13 25.43,6.03 R9.2
JTMS: length 13.7
  TOP w0.203: JP1.7 34.61,6.07 34.61,13.07 34.87,13.33 U1.46
  BOTTOM w0.203: R1.2 31.02,7.7 31.56,7.16 31.92,7.16 JP1.7
RST: length 57.7
  TOP w0.203: 52.86,6.09 53.43,6.66 54.95,6.66 55.67,5.95 R17.2 ; 52.86,6.09 52.86,7.52 52.66,7.73 50.78,7.73 50.32,8.19 50.32,11.28 50.07,11.54 46.27,11.54 46.06,11.74 46.06,14.83 46.27,15.03 U1.7 ; 52.86,6.09 C6.1 v1(52.86,4.68) 51.08,4.68 49.05,2.65 SW1.1 45.14,1.54 44.33,0.72 26.5,0.72 24.85,2.36 24.85,4.07 JP1.15
S1: length 27.7
  TOP w0.203: TP1.1 R11.1 ; TP1.1 v1(12.73,21.19) ; TP1.1 7.5,21.19 6.48,22.21 R38.1 ; U4.42 v1(18.71,26.16)
  BOTTOM w0.203: v1(12.73,21.19) 17.3,21.19 17.81,21.7 17.81,25.25 v1(18.71,26.16)
S2: length 65.7
  TOP w0.203: TP3.1 7.5,11.79 6.48,12.81 R36.1 ; TP3.1 R12.1 ; TP3.1 v1(12.47,12.81) ; v1(45.75,25.76) 42.78,25.76 42.31,26.23 U5.42
  BOTTOM w0.203: v1(45.75,25.76) 45.75,23.22 46.26,22.71 46.26,18.4 45.24,17.38 45.24,12.76 45.04,12.55 41.68,12.55 40.67,11.54 40.67,10.52 40.32,10.17 19.43,10.17 19.08,10.52 19.08,13.32 18.32,14.08 13.74,14.08 v1(12.47,12.81)
SG_TST1: length 25.4
  TOP w0.203: U4.38 21.91,27.25 25.13,24.03 26.15,24.03 27.21,22.97 27.21,20.17 v1(26.44,19.41) ; v1(29.49,17.63) 30,17.63 30.51,17.13 R7.2
  BOTTOM w0.203: v1(26.44,19.41) 26.44,18.14 26.95,17.63 v1(29.49,17.63)
SG_TST2: length 28.9
  TOP w0.203: U5.38 39.11,29.36 38.13,30.33 36.6,30.33 35.33,29.06 31.27,29.06 29.75,27.54 29.75,23.98 29.24,23.48 28.43,23.48 28.22,23.27 28.22,19.16 27.71,18.65 27.71,16.36 29.75,14.33 R8.2
SPI1_CS1: length 33
  TOP w0.203: v1(39.4,18.14) 39.4,11.66 v1(39.77,11.28) 40.05,11.01 U1.52 ; U4.18 v1(21.91,20.21)
  BOTTOM w0.203: 39.4,18.19 v1(39.4,18.14) 38.13,18.14 36.6,19.67 36.6,21.19 36.35,21.44 26.44,21.44 25.43,22.46 22.2,22.46 21.91,22.17 v1(21.91,20.21)
SPI1_CS2: length 33.1
  TOP w0.203: v1(40.67,18.14) 40.67,12.55 40.55,12.43 U1.53 ; U5.18 v1(39.11,31.86) ; v1(39.65,24.49) 39.14,23.98 38.64,23.98 38.13,23.48 v1(38.13,21.7)
  BOTTOM w0.203: v1(39.65,24.49) 39.11,25.04 v1(39.11,31.86) ; v1(38.13,21.7) 38.13,20.33 40.32,18.14 v1(40.67,18.14)
SPI1_MISO: length 55.6
  TOP w0.203: v1(42.7,33.64) 42.31,34.03 U5.14 ; U4.14 v1(18.71,20.03) ; v1(38.33,18.9) 42.9,18.9 43.85,19.85 U1.22 43.85,23.51 43.97,23.63 v1(43.97,24.49)
  BOTTOM w0.203: v1(42.7,33.64) 42.7,31.1 44.22,29.57 44.22,24.75 v1(43.97,24.49) ; v1(38.33,18.9) 37.11,20.12 37.11,21.44 36.6,21.95 26.7,21.95 25.68,22.97 21.06,22.97 20.86,22.76 20.86,21.44 20.35,20.94 20.35,19.41 20.06,19.13 18.85,19.13 18.71,19.27 v1(18.71,20.03)
SPI1_MOSI: length 52.9
  TOP w0.203: v1(42.7,23.98) 43.23,23.98 43.35,23.87 U1.23 43.35,20.31 v1(42.95,19.92) ; U4.15 v1(19.51,20.25) ; v1(41.68,33.13) 41.51,33.31 U5.15
  BOTTOM w0.203: v1(41.68,33.13) 41.68,25 v1(42.7,23.98) 41.84,23.13 27.3,23.13 25.94,24.49 24.67,24.49 23.4,25.76 20.76,25.76 19.51,24.51 v1(19.51,20.25)
SPI1_SCK: length 48.9
  TOP w0.203: v1(44.73,23.98) 44.38,23.63 44.38,22.21 U1.21 ; U4.16 v1(20.31,24.45) ; v1(44.22,30.59) 42.95,31.86 41.68,31.86 40.71,32.84 U5.16
  BOTTOM w0.203: v1(44.22,30.59) 44.73,30.08 v1(44.73,23.98) 43.21,22.46 26.95,22.46 25.78,23.63 22.98,23.63 22.16,24.45 v1(20.31,24.45)
UART_RX: length 28.6
  TOP w0.203: J1.2 33.4,7.07 34.06,7.73 34.06,14.03 34.87,14.83 U1.43
UART_TX: length 28.2
  TOP w0.203: J1.1 15.37,8.74 33.35,8.74 33.56,8.95 33.56,14.84 34.06,15.35 34.85,15.35 34.87,15.33 U1.42
VM: length 43.2
  TOP w0.508: J2.4 9.68,43.18 R32.1 R33.1
  BOTTOM w0.508: 16.28,43.03 16.79,42.53 R34.1 ; 16.28,43.03 14.47,43.03 J2.4 ; 16.28,43.03 20.86,43.03 ; R23.2 R22.2 ; R22.2 25.66,43.39 26.31,44.04 27.6,44.04 28.01,44.45 C13.1 29.95,45.59 30.65,46.29 C14.2 ; R22.2 20.86,43.03 ; R35.1 21.36,42.53 20.86,43.03
N05483: length 29.8
  TOP w0.203: U1.32 v1(38.85,20.47) ; C3.1 47.59,5.95 46.88,6.66 45.35,6.66 44.78,6.09 C5.1 44.78,4.38 v1(44.99,4.17) ; U1.13 50.46,18.03 v1(50.57,18.14) ; R18.1 51.89,13.44 50.95,12.5 50.95,12.05 ; v1(45.49,20.43) 45.35,20.58 U1.19 45.35,23.51 45.57,23.73 v1(47.02,23.73) ; 50.95,12.05 v1(50.95,8.62) R19.1 ; 50.95,12.05 50.94,12.03 U1.1 ; U1.64 46.84,9.68 v1(47.02,9.51) ; v1(36.1,10.78) 36.2,10.88 U1.48
  BOTTOM w0.203: C4.1 48.38,23.48 48.12,23.73 v1(47.02,23.73)
N21992: length 10.1
  TOP w0.203: C26.1 9.68,24.35 10.3,23.73 16.63,23.73 16.76,23.86 17.46,23.86 17.91,23.41 U4.13
N22004: length 40.9
  TOP w0.203: v1(12.73,35.41) 12.07,35.41 11.81,35.16 R33.2 R32.2 12.69,37.19 13.71,38.21 C30.2 13.74,38.84 14.12,39.22 19.24,39.22 19.34,39.13 19.84,39.13 19.93,39.22 23.14,39.22 23.4,38.97 C31.1 23.4,37.57 23.51,37.46 U4.36 v1(23.51,32.99) ; U4.4 12.91,30.16 v1(12.73,30.33) ; v1(29.49,32.11) 29.49,30.51 29.14,30.16 U4.30
  BOTTOM w0.203: v1(29.49,32.11) 28.62,32.99 v1(23.51,32.99) ; v1(12.73,35.41) 13.24,34.91 13.24,30.84 v1(12.73,30.33)
N22032: length 12.7
  TOP w0.203: U4.9 v1(16.91,26.16) ; v1(16.03,22.46) 16.81,22.46 U4.12 17.11,20.46 15.33,18.68 R28.2
  BOTTOM w0.203: v1(16.03,22.46) 15.52,22.97 15.52,25.76 15.92,26.16 v1(16.91,26.16)
N22036: length 17.9
  TOP w0.203: 23.33,18.68 R30.2 24.67,18.65 ; U4.22 25.11,19.09 24.67,18.65 ; 24.67,18.65 26.95,18.65 27.71,19.41 27.71,23.78 27.92,23.98 28.99,23.98 29.21,24.2 29.21,25.71 28.77,26.16 U4.25
N22220: length 12.6
  TOP w0.203: U4.35 v1(24.31,36.84) ; v1(15.62,36.84) 15.62,37.85 C30.1
  BOTTOM w0.203: v1(15.62,36.84) 16.19,36.27 23.74,36.27 v1(24.31,36.84)
N35028: length 14.6
  TOP w0.203: v1(44.22,32.62) 44.55,32.29 U5.4 ; C32.2 v1(34.06,23.73) ; v1(37.87,29.57) 37.51,29.2 U5.36 ; v1(31.27,32.62) 31.6,32.29 U5.30
  BOTTOM w0.203: C33.1 48.29,25.25 v1(47.78,25.76) ; R34.2 18.32,40.47 19.05,39.73 v1(19.59,39.73) 22.27,39.73 22.89,40.35 R35.2
N35250: length 8.8
  TOP w0.203: C27.1 49.01,42.02 45.58,38.59 43.55,38.59 43.11,39.03 U5.13
N35390: length 16.2
  TOP w0.203: v1(43.03,42.53) 43.91,42.53 ; 43.91,42.53 U5.12 ; 43.91,42.53 43.91,43.73 43.9,43.73 R29.2 ; v1(43.46,35.41) 44.34,36.29 U5.9
  BOTTOM w0.203: v1(43.46,35.41) 44.19,36.14 44.19,41.37 v1(43.03,42.53)
N35394: length 12.9
  TOP w0.203: U5.25 32.25,36.29 31.8,36.74 31.8,38.24 33.85,40.29 U5.22 35.91,41.92 35.91,41.92 R31.2
N35558: length 6.6
  TOP w0.203: U5.35 36.71,25.86 36.35,25.51 33.16,25.51 32.54,24.89 C32.1 32.54,24.49
N40313: length 15
  TOP w0.203: R10.1 52.58,18.4 51.89,17.71 51.89,15.66 52.06,15.5 52.25,15.5 52.61,15.14 C1.1 ; C1.1 54.03,15.09 56.44,12.68 Y1.2 ; C1.1 51.09,15.09 50.02,14.03 U1.5
N40433: length 15.8
  TOP w0.203: 52.58,19.92 52.46,19.92 51.18,18.64 51.18,15.83 49.88,14.53 U1.6 ; 52.58,19.92 R10.2 53.24,19.92 53.75,20.43 Y1.1 ; 52.58,19.92 51.89,20.61 51.89,22.65 52.46,23.22 C2.1
N53650: length 6.3
  TOP w0.203: U1.28 40.85,25.33 40.67,25.51 38.86,25.51 38.13,24.77 R13.2
N54391: length 2.5
  TOP w0.203: R14.1 44.73,7.5 44.05,8.19 U1.60
N107724: length 4.3
  TOP w0.203: R38.2 4.35,22.06 4.91,21.49 6.04,21.49 7.39,20.14 Q1.1
N107754: length 4.5
  TOP w0.203: R40.2 5.87,20.15 6.69,19.33 8.81,19.33 8.96,19.48 9.09,19.48 9.63,20.02 Q1.3
N108391: length 7.3
  TOP w0.203: D3.1 3.06,22.14 3.89,22.97 7.94,22.97 7.99,22.91 8.12,22.91 8.66,22.37 Q1.2
N108637: length 4.4
  TOP w0.203: Q2.1 7.71,15.7 7.17,16.24 7.04,16.24 6.41,16.87 4.96,16.87 4.35,17.49 R39.2
N108657: length 4.5
  TOP w0.203: R41.2 5.87,15.58 6.69,14.76 8.81,14.76 8.96,14.91 9.09,14.91 9.63,15.45 Q2.3
N108719: length 7.3
  TOP w0.203: D4.1 3.06,17.57 3.89,18.4 7.94,18.4 7.99,18.34 8.12,18.34 8.66,17.8 Q2.2
N109031: length 4.4
  TOP w0.203: R36.2 4.35,12.66 4.96,12.05 6.41,12.05 7.04,11.41 7.17,11.41 7.71,10.87 Q3.1
N109051: length 4.5
  TOP w0.203: R42.2 5.87,10.75 6.69,9.93 8.81,9.93 8.96,10.08 9.09,10.08 9.63,10.62 Q3.3
N109113: length 7.3
  TOP w0.203: Q3.2 8.66,12.97 8.12,13.51 7.99,13.51 7.99,13.52 3.84,13.52 3.06,12.74 D5.1
N109117: length 4.4
  TOP w0.203: Q4.1 7.71,6.3 7.17,6.84 7.04,6.84 6.41,7.47 4.96,7.47 4.35,8.09 R37.2
N109155: length 4.5
  TOP w0.203: R43.2 5.87,6.18 6.69,5.36 8.81,5.36 8.96,5.51 9.09,5.51 9.63,6.05 Q4.3
N109209: length 7.3
  TOP w0.203: Q4.2 8.66,8.4 8.12,8.94 7.99,8.94 7.94,9 3.89,9 3.06,8.17 D6.1
N115260: length 18.4
  BOTTOM w0.203: L1.1 34.9,38.89 34.7,39.1 34.68,39.1 33.78,40 D1.2 33.78,42.16 33.74,42.2 ; 33.74,42.2 33.05,42.89 C11.2 ; 33.74,42.2 34.88,43.34 38.18,43.34 39.5,44.66 U3.8
N115348: length 12.3
  BOTTOM w0.203: U3.5 44.1,48.47 44.69,49.07 48.68,49.07 49.41,48.34 ; R24.2 49,46.03 48.29,46.74 48.29,47.91 48.72,48.34 49.41,48.34 ; 49.41,48.34 R26.1
N115408: length 5.2
  BOTTOM w0.203: U3.6 43.4,47.2 44.52,48.32 C16.1 R25.1
N115520: length 2.3
  TOP w0.203: v1(52.33,48.34) 52.91,48.34 52.92,48.33 D2.1
  BOTTOM w0.203: R27.1 v1(52.33,48.34)
N115576: length 13.5
  BOTTOM w0.508: R23.1 R22.1 27.21,43.06 31.52,43.06 32.03,43.57 32.03,44.68 32.36,45.02 35.04,45.02 35.95,45.93 U3.2
N115630: length 2.7
  BOTTOM w0.203: U3.1 36.8,44.21 36.65,44.05 C11.1
N115702: length 6.4
  BOTTOM w0.203: C15.2 35.36,46.29 35.74,46.67 38,46.67 38.18,46.85 38.18,47.94 37.65,48.47 U3.4
N116307: length 13
  BOTTOM w0.203: C8.1 C7.1 45.39,38.74 45.98,39.33 46.59,39.33 46.92,39.66 R21.1 R20.1 47.85,42.45 48.42,43.02 U2.3 49.53,43.02 50.05,42.5 50.05,41.64 49.53,41.12 U2.1
N124957: length 11.5
  TOP w0.203: U1.25 42.35,19.98 41.68,19.32 38.78,19.32 37.66,20.43 R4.1
N124977: length 2.7
  TOP w0.203: R5.1 33.81,18.62 34.6,17.83 U1.37
N124981: length 4.7
  TOP w0.203: R7.1 33.05,16.11 34.27,17.33 U1.38
N124985: length 5.2
  TOP w0.203: U1.39 34.51,16.83 32.03,14.36 R8.1
N1153681: length 2.2
  BOTTOM w0.203: C17.1 47.09,45.29 47.32,45.52 R25.2
N9821225: length 52.8
  TOP w0.203: v1(41.68,20.17) 41.85,20.34 U1.26 ; v1(13.49,17.89) 12.35,17.89 12.09,18.14 R11.2
  BOTTOM w0.203: v1(13.49,17.89) 13.49,14.84 13.74,14.59 18.82,14.59 19.84,13.57 19.84,11.79 20.09,11.54 39.17,11.54 40.7,13.06 44.4,13.06 44.61,13.27 44.61,17.51 45.75,18.65 45.75,19.16 44.22,20.68 42.19,20.68 v1(41.68,20.17)
N9821252: length 71.5
  TOP w0.203: U1.27 41.35,20.85 v1(40.67,20.17) ; v1(44.73,18.9) 46.26,17.38 v1(47.02,17.38) ; R12.2 v1(12.47,8.74)
  BOTTOM w0.203: v1(40.67,20.17) 40.67,19.41 41.18,18.9 v1(44.73,18.9) ; v1(12.47,8.74) 12.47,1.38 13.07,0.78 47.69,0.78 48.29,1.38 48.29,16.11 v1(47.02,17.38)
N9821256: length 37.7
  TOP w0.203: v1(42.19,11.38) 42.55,11.03 U1.57 ; v1(16.79,12.81) 16.03,13.57 R15.2
  BOTTOM w0.203: v1(42.19,11.38) 41.68,10.87 41.68,9.46 41.48,9.25 18.06,9.25 17.55,9.76 17.55,12.6 17.35,12.81 v1(16.79,12.81)
N9821257: length 32.6
  TOP w0.203: R16.2 v1(16.79,11.79) ; v1(43.21,7.98) 43.05,8.14 U1.58
  BOTTOM w0.203: v1(16.79,11.79) 16.79,9.51 17.55,8.74 42.45,8.74 v1(43.21,7.98)

## Copper pours and planes (outline as drawn; the poured copper is in the pictures)
GND on TOP: 0.5,0.5 0.5,49.5 59.5,49.5 59.5,0.5 ; 39 cut-outs
GND on BOTTOM: 0.5,0.5 0.5,49.5 59.5,49.5 59.5,0.5 ; 24 cut-outs
GND on GND: 0.5,0.5 0.5,49.5 59.5,49.5 59.5,0.5
VCC3V3 on POWER: 0.5,0.5 0.5,49.5 20.1,49.5 20.1,46.38 23.95,42.53 38.68,42.53 40.21,41.01 50.27,41.01 54.38,45.11 54.38,46.8 52.56,48.61 33.26,48.61 32.37,49.5 59.5,49.5 59.5,0.5 ; 6 cut-outs
VCC5V on POWER: 40.62,42.01 39.1,43.53 24.37,43.53 21.1,46.8 21.1,49.5 30.96,49.5 32.84,47.61 52.14,47.61 53.38,46.38 53.38,45.53 49.86,42.01
N05483 on POWER: 43.92,2.39 41.42,4.89 41.42,9.46 40.88,10.01 34.78,10.01 34.06,10.73 34.06,19.46 38.59,23.99 47.83,23.99 53.63,18.19 53.63,8.19 47.83,2.39
N35028 on POWER: 32.24,23.21 32.02,23.43 32.02,29.27 23.35,37.95 18.52,37.95 16.78,39.69 16.78,41.81 17.25,42.28 22.17,42.28 29.54,34.91 47.83,34.91 50.33,32.41 50.33,26.22 49.6,25.5 47.73,25.5 46.72,26.52 44.72,26.52 44.72,28.76 41.89,31.6 39.7,31.6 38.9,30.8 38.9,27.75 34.36,23.21

## Text on the board
Ref Des/Silkscreen Bottom: 2019/04/12 | Microsatellite | SADA_controller
Ref Des/Silkscreen Top: 1OA1 | 1OA2 | 1OB1 | 1OB2 | 2OA2 | 2OB2 | 2OA1 | 2OB1
PLACE_BOUND_TOP: FIGURE | SIZE | 0.3 | 1.0 | 1.2 | 3.2 | DRILL CHART: TOP to BOTTOM | ALL UNITS ARE IN MILLIMETERS | PLATED | QTY | 127 | 28 | 12 | 4
